# Altium PCB RiskChemi_Sensors_V2.04M2.PcbDoc
Units mil, origin at the board's own origin, x right, y up, seen from the top; angles counter-clockwise.
Board outline 6000 x 4000 mil, 2 copper layers (Top Layer, Bottom Layer); 86 components, 52 nets, 285 pads, 696 vias.
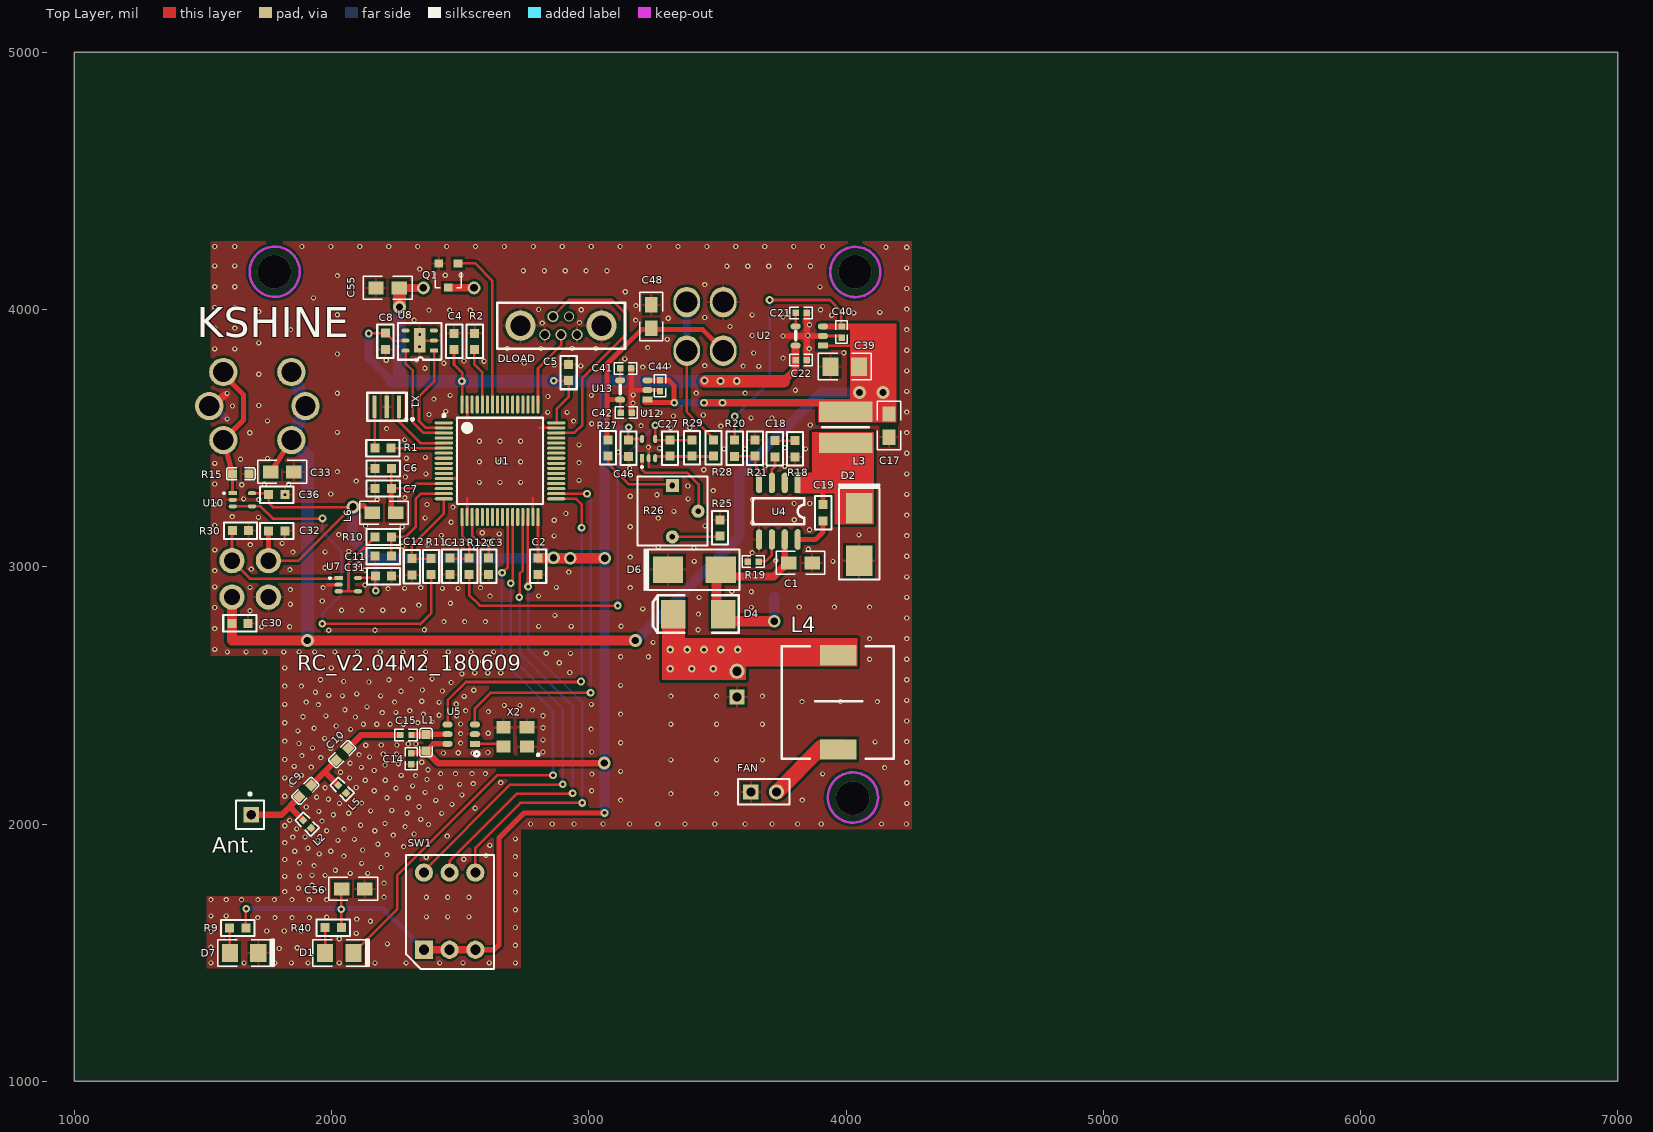
[diagram p0: Top Layer view]
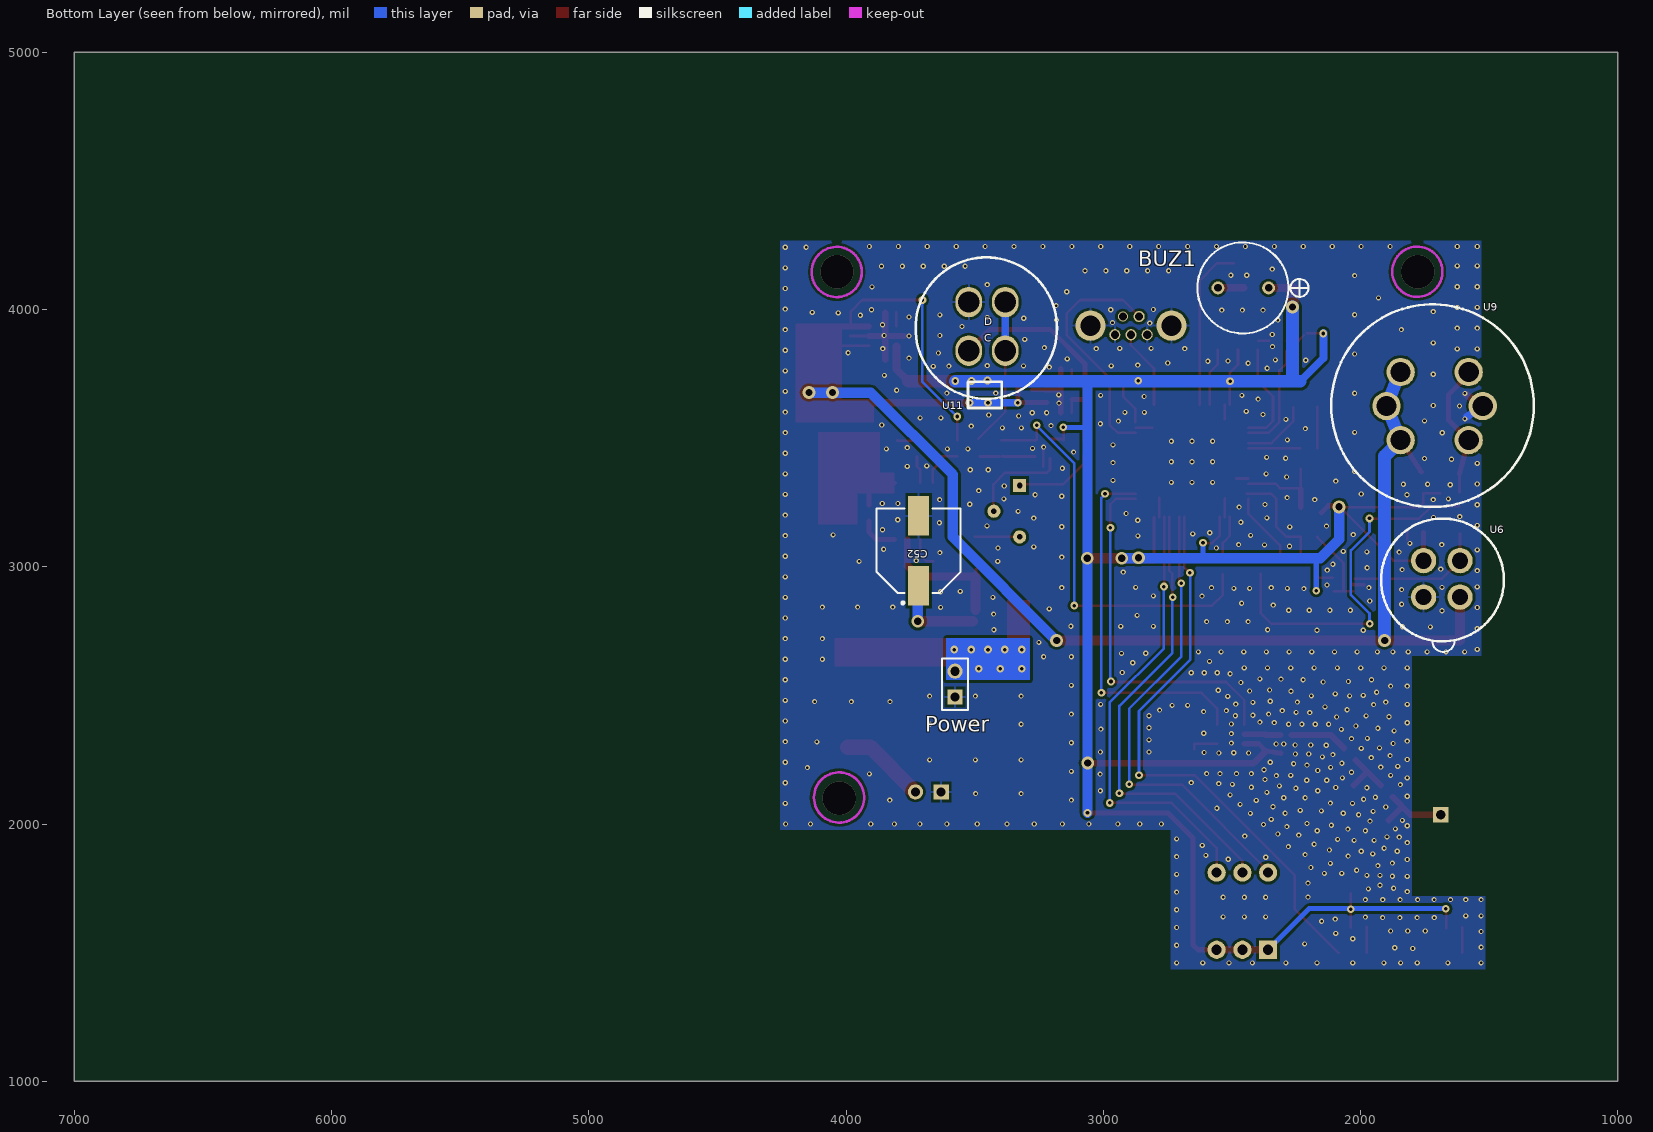
[diagram p1: Bottom Layer view, seen from below]

## Layer stack, top to bottom
Top Solder: solder mask 0.4, Solder Resist, Dk 3.5
Top Layer: signal copper 1.4
Dielectric 1: dielectric 12.6, FR-4, Dk 4.8
Bottom Layer: signal copper 1.4
Bottom Solder: solder mask 0.4, Solder Resist, Dk 3.5

## Board outline
1000,1000 7000,1000 7000,5000 1000,5000

## Design rules (kind name [scope] priority, off if disabled: settings)
Clearance [All] p1: gap=3
ComponentClearance [All] p1: gap=0 collisioncheckmode=3 verticalgap=0 showdistances=FALSE
MinimumSolderMaskSliver [All] p1 off: minsoldermaskwidth=10
PolygonConnect PolygonConnect_1 [IsVia] p1: connectstyle=Direct reliefconductorwidth=10 reliefentries=2 polygonreliefangle="90 Angle" airgapwidth=10
PolygonConnect [All] p2: connectstyle=Relief reliefconductorwidth=10 reliefentries=4 polygonreliefangle="90 Angle" airgapwidth=10
RoutingVias [All] p1: holewidth=28 width=50 viastyle="Through Hole" minholewidth=28 minwidth=50 maxholewidth=28 maxwidth=50
SilkToSilkClearance [All] p1 off: silktosilkclearance=10
SilkToSolderMaskClearance [IsPad] p1 off: minsilkscreentomaskgap=10 clearancetoexposedcopper=TRUE
SolderMaskExpansion [All] p1: expansion=4
Width [All] p1: maxlimit=100 minlimit=10 preferedwidth=10
26 further rules are at their usual default settings.

## Components (designator, comment, footprint, x,y, rotation, side; value= is the part's Value field where it differs from the comment)
Ant. "Antenna" PIN1 1683,2036 r0 top
BUZ1 "BUZZER 0905 through hole" BUZ0905 2455,4084 r180 bottom
C1 "10uF" 0805 3778,3015 r0 top
C2 "100nF" 0603 2799,3063 r0 top
C3 "100nF" 0603 2606,3063 r0 top
C4 "100nF" 0603 2481,3815 r180 top
C5 "100nF" 0603 2926,3694 r180 top
C6 "100nF" 0603 2262,3386 r270 top
C7 "1uF" 0603 2262,3309 r270 top
C8 "100nF" 0603 2205,3938 r0 top
C9 "0.8pF" 0603C 1900,2129 r315 top
C10 "2.2pF" 0603C 2043,2272 r315 top (schematic designator R3)
C11 "100nF" 0603 2140,3037 r90 top
C12 "100nF" 0603 2308,3061 r0 top
C13 "100nF" 0603 2457,3063 r0 top
C14 "100nF" 0402 2306,2360 r0 top
C15 "82pF" 0402 2183,2342 r90 top
C17 "22uF" 0805 4167,3594 r270 top
C18 "150pF" 0603 3719,3520 r0 top
C19 "100nF" 0603 3907,3271 r0 top
C21 "NULL" 0402 3719,3983 r90 top
C22 "1uF" 0402 3719,3799 r90 top
C27 "1uF" 0603 3320,3399.95 r180 top
C30 "1uF" 0603 1583,2776 r90 top
C31 "100nF" 0603 2141,2959 r90 top
C32 "100nF" 0603 1726,3135 r90 top
C33 "10uF" 0805 1763,3369 r0 top
C36 "100nF" 0603 1726,3276 r90 top
C39 "22uF" 1206 4050,3778 r180 top
C40 "100nF" 0402 3979,4019 r0 top
C41 "22nF" 0402 3037,3767 r90 top
C42 "1uF" 0402 3039,3595 r90 top
C44 "100nF" 0402 3273,3810 r0 top
C46 "100nF" 0603 3150,3522 r0 top
C48 "10uF" 0805 3243,3928 r90 top
C52 "47uF" cap_pol_8*10.2 3718,3062 r90 bottom
C55 "10uF" 0805 2263,4084 r180 top
C56 "10uF" 0805 2039,1748 r0 top
D1 "LED" 1206_LED 2028,1502 r0 top
D2 "B290-13-F" B290 4051,3228 r270 top
D4 "1N4007" 6032_pol 3428,2814 r180 top
D6 "SMAJ36CA" B290 3308,2989 r0 top
D7 "LED_POWER" 1206_LED 1658,1502 r0 top
DLOAD "USB Connector" Mini_USB 2892,3902 r90 top
FAN "Header 2" HDR1X2 3630,2125 r0 top
L1 "100nH" 0603C 2368,2318 r0 top
L2 "NULL" 0402 1827,2072 r45 top
L3 "15uH" "4*4 Inductor" 3991,3542 r180 top
L4 "22uH" 10*10Inductor 3969,2290 r0 top
L5 "27nH" 0402 1963,2208 r45 top (schematic designator C16)
L6 "10uH" 0805 2249,3210 r180 top
Power "Header 2" HDR1X2 3576,2494 r90 bottom
Q1 "2N7002" 2N7002 2456,4133 r180 top
R1 "100R" 0603 2261,3465 r270 top
R2 "10K" 0603 2561,3815 r180 top
R9 "510R" 0603 1697,1600 r270 top
R10 "1M" 0603 2262,3120 r270 top
R11 "1M" 0603 2383,3062 r0 top
R12 "1M" 0603 2531,3063 r0 top
R15 "200K" 0603C 1646,3362 r90 top
R18 "100k" 0603 3797,3520 r0 top
R19 "200K" 0402 3746,3024 r270 top
R20 "205K" 0603 3563,3522 r0 top
R21 "40.2K" 0603 3650,3400 r180 top
R25 "5.1K" 0603 3514,3090 r180 top
R26 "3362P_2K_adj_res" res_adj 3325,3316 r0 top
R27 "5.1K" 0603 3071,3523 r0 top
R28 "1K" 0603 3489,3401 r180 top
R29 "100K" 0603 3397,3523 r0 top
R30 "10K" 0603 1585,3136 r90 top
R40 "510R" 0603 2068,1601 r270 top
SW1 "HRO韩国韩荣拨码开关" SW_6P_HRO 2359,1511 r90 top
U1 "STM32F103RBT6" LQFP64_N 2655,3412 r0 top
U2 "RT9013-33GB" SOT-23-5 3863,3899 r90 top
U4 "MP2565DN" so-8 3812,3326 r270 top
U5 "CMT2119A" SOT23-6 2510,2351 r90 top
U6 "TGS2602" "Gas Sensor TGS2602 Slot" 1613,2882 r0 bottom
U7 "LMV321SQ3T2G" SC-70-5 2028,2956 r0 top
U8 "SHT20" SHT20 2398,3840 r180 top
U9 "Gas Sensor 2M010" "Gas Sensor 2M010 Slot" 1844,3757 r180 bottom
U10 "LMV321SQ3T2G" SC-70-5 1616,3286 r0 top
U11 "WS101" Gas_Sensor_WS101_Slot 3452.45,3921 r180 bottom
U12 "LMV321SQ3T2G" SC-70-5 3207,3422 r90 top
U13 "RT9193-30GB" SOT-23-5 3181,3689 r90 top
X1 "8M smd" 8Mhz_XTAL 2262,3622 r180 top
X2 "XTAL_Negative" XTAL3225 2669,2376 r0 top

## Footprints (in the part's own frame and the unit in brackets; to place one, negate y for a bottom-side part, rotate by r counter-clockwise, add the part's x,y. Pads: shape width x height; smd on the part's side, far side on the other; paste and mask are expansions set on the pad)
2N7002 [mm]
  rect 0.85x0.8 smd: 1(0.047,1.221) 2(-0.903,-1.179) 3(0.997,-1.179)
  silkscreen extent -1.23,-0.28 1.32,1.22
"4*4 Inductor" [mm]
  rect 5.3x2 smd: 1(-0.203,-1.548) 2(-0.203,1.552)
  silkscreen extent -2.46,0 2.13,0
8Mhz_XTAL [mm]
  rect 0.4x2.2 smd: 1(0,0) 2(1.2,0) 3(2.4,0)
  silkscreen extent -1.45,-1.39 3.13,1.4
10*10Inductor [mm]
  rect 3.6x2 smd: 1(0,0) 2(0,9.3)
  silkscreen extent -5.55,-0.92 5.49,10.19
0402 [mil]
  rect 25x25 smd: 1(3.98,-127.99) 2(3.98,-84.98)
  silkscreen extent -19,-150 26,-63
0603 [mil]
  rect 35x35 smd: 1(4.25,-92.76) 2(4.25,-29.76)
  silkscreen extent -27,-126 36,4
0603C [mil]
  rect 35x35 smd: 1(-0.83,30.88) 2(-0.83,-34.12)
  silkscreen extent -24,-57 23,54
0805 [mil]
  rect 60x50 smd: 1(90,0) 2(0,0)
  silkscreen extent -50,-45 140,45
1206 [mm]
  rect 1.6x1.8 smd: 1(0,0) 2(2.8,0)
  silkscreen extent -1.2,-1.3 4,1.3
1206_LED [mm]
  rect 1.6x1.8 smd: 1(-1.344,-0.081) 2(1.456,-0.081)
  silkscreen extent -2.54,-1.38 2.98,1.22
6032_pol [mm]
  rect 2.4x2.8 smd: 1(2.538,-0.041) 2(-2.422,-0.041)
  silkscreen extent -3.95,-1.89 4.53,1.81
B290 [mm]
  rect 3x2.6 smd: 1(5.2,0) 2(0,0)
  silkscreen extent -2.34,-2 7.06,2
BUZ0905 [mm] "Buzzer"
  round 1.27 hole 0.75: 1(2.485,0.002) 2(-2.515,0.002)
  silkscreen extent -4.55,-4.5 6.43,4.5
cap_pol_8*10.2 [mm]
  rect 3.9x2.05 smd: 1(-3.443,-0.001) 2(3.457,-0.001)
  silkscreen extent -5.27,-4.15 4.16,4.15
"Gas Sensor 2M010 Slot" [mm]
  round 2.8 hole 2: 1(0,0) 2(-1.391,-3.36) 3(0,-6.719) 4(6.719,-6.719) 5(8.109,-3.36) 6(6.719,0)
  silkscreen extent -6.84,-13.32 13.16,6.68
"Gas Sensor TGS2602 Slot" [mm]
  round 2.5 hole 1.6: 1(0,0) 2(0,-3.6) 3(3.6,-3.6) 4(3.6,0)
  silkscreen extent -4.33,-7.76 7.8,5.42
Gas_Sensor_WS101_Slot [mm]
  oval 2.6x3 hole 2.1: 1(-1.783,2.742) 2(-1.783,-2.058) 3(1.817,-2.058) 4(1.817,2.742)
  silkscreen extent -7.04,-7.72 6.93,7.16
HDR1X2 [mm] "Connector; Header; 2 Position"
  rect 1.5x1.5 hole 0.9: 1(0,0)
  round 1.5 hole 0.9: 2(2.54,0)
  silkscreen extent -1.27,-1.27 3.81,1.27
LQFP64_N [mm] "Thin QFP, 64-Leads, Body 10x10mm, Pitch 0.5mm, IPC Medium Density"
  oval 1.8x0.3 smd: 1(-5.55,3.75) 2(-5.55,3.25) 3(-5.55,2.75) 4(-5.55,2.25) 5(-5.55,1.75) 6(-5.55,1.25) 7(-5.55,0.75) 8(-5.55,0.25) 9(-5.55,-0.25) 10(-5.55,-0.75) 11(-5.55,-1.25) 12(-5.55,-1.75) 13(-5.55,-2.25) 14(-5.55,-2.75) 15(-5.55,-3.25) 16(-5.55,-3.75) 33(5.55,-3.75) 34(5.55,-3.25) 35(5.55,-2.75) 36(5.55,-2.25) 37(5.55,-1.75) 38(5.55,-1.25) 39(5.55,-0.75) 40(5.55,-0.25) 41(5.55,0.25) 42(5.55,0.75) 43(5.55,1.25) 44(5.55,1.75) 45(5.55,2.25) 46(5.55,2.75) 47(5.55,3.25) 48(5.55,3.75)
  oval 0.3x1.8 smd: 17(-3.75,-5.55) 18(-3.25,-5.55) 19(-2.75,-5.55) 20(-2.25,-5.55) 21(-1.75,-5.55) 22(-1.25,-5.55) 23(-0.75,-5.55) 24(-0.25,-5.55) 25(0.25,-5.55) 26(0.75,-5.55) 27(1.25,-5.55) 28(1.75,-5.55) 29(2.25,-5.55) 30(2.75,-5.55) 31(3.25,-5.55) 32(3.75,-5.55) 49(3.75,5.55) 50(3.25,5.55) 51(2.75,5.55) 52(2.25,5.55) 53(1.75,5.55) 54(1.25,5.55) 55(0.75,5.55) 56(0.25,5.55) 57(-0.25,5.55) 58(-0.75,5.55) 59(-1.25,5.55) 60(-1.75,5.55) 61(-2.25,5.55) 62(-2.75,5.55) 63(-3.25,5.55) 64(-3.75,5.55)
  silkscreen extent -5.67,-4.25 4.25,4.57, body extent -5,-5 5,5, height 1.6
Mini_USB [mm] "180 degree"
  round 1.1 hole 0.8: 1(0,-1.6) 3(0,0) 4(1.8,0.8) 5(0,1.6)
  round 1 hole 0.8: 2(1.8,-0.8)
  round 3 hole 2: 6(0.9,4) 7(0.9,-4)
  silkscreen extent -1.39,-6.32 3.15,6.3
PIN1 [mm] "Generic Antenna; 1 Lead"
  rect 1.5x1.5 hole 0.9: 1(0.127,0)
  silkscreen extent -1.4,-1.4 1.4,2.17
res_adj [mm]
  rect 1.3x1.3 hole 0.55: 1(0,0)
  round 1.3 hole 0.55: 2(2.54,-2.54) 3(0,-5.08)
  silkscreen extent -3.44,-5.95 3.45,0.9
SC-70-5 [mm]
  rect 0.8x0.4 smd: 1(0,0)
  oval 0.8x0.4 smd: 2(0,-0.65) 3(0,-1.3) 4(1.9,-1.3) 5(1.9,0)
  silkscreen extent -0.91,-0.05 -0.81,0.05
SHT20 [mm]
  rect 0.8x0.4 smd: 1(0,0)
  oval 0.8x0.4 smd: 2(0,-1) 3(0,-2) 4(2.8,-2) 5(2.8,-1) 6(2.8,0)
  rect 1.1x2.4 smd: 2(1.402,-1.019)
  silkscreen extent -0.75,-2.72 3.53,0.89
so-8 [mil]
  rect 80x24 smd: 1(0,0)
  oval 80x24 smd: 2(0,-50) 3(0,-100) 4(0,-150) 5(220,-150) 6(220,-100) 7(220,-50) 8(220,0)
  silkscreen extent 60,-175 160,25
SOT23-6 [mm]
  rect 0.6x1 smd: 1(-0.998,-1.204)
  oval 0.6x1 smd: 2(-0.048,-1.204) 3(0.902,-1.204) 4(0.902,1.496) 5(-0.048,1.496) 6(-0.998,1.496)
  silkscreen extent -2.23,-1.62 -1.76,-1.14, body extent -1.5,-1.3 1.4,1.5, height 1.2
SOT-23-5 [mm]
  rect 0.6x1 smd: 1(-0.995,-1.201)
  oval 0.6x1 smd: 2(-0.045,-1.201) 3(0.905,-1.201) 4(0.905,1.499) 5(-0.995,1.499)
  silkscreen extent -0.4,1.5 0.4,1.5, body extent -1.5,-1.3 1.4,1.5, height 1.2
SW_6P_HRO [mm]
  rect 1.8x1.8 hole 1: 1(0,0)
  round 1.8 hole 1: 2(0,-2.54) 3(0,-5.08) 4(7.62,-5.08) 5(7.62,-2.54) 6(7.62,0)
  silkscreen extent -1.89,-6.93 9.34,1.74
XTAL3225 [mm]
  rect 1.4x1.2 smd: 1(0,-1.9) 2(2.3,-1.9) 4(0,0)
  rect 1.5x1.2 smd: 3(2.3,0)
  silkscreen extent 3.32,-2.82 3.52,-2.62

## Part data
Ant.: "Generic Antenna"
BUZ1: library part BUZZER, "Buzzer"
C1 C17: library part Cap, "Capacitor,50V"
C2 C3 C4 C5 C6 C7 C8 C11 C12 C13 C14 C15 C18 C19 C21 C22 C27 C30 C31 C32 C33 C36 C39 C40 C41 C42 C44 C46 C48 C55 C56 L2 L5: library part Cap, "Capacitor"
C9 C10 L1 L6: library part Inductor, "Inductor"
C52: library part "Cap Pol1", "Polarized Capacitor (Radial)"
D1 D7: library part LED0, "Typical INFRARED GaAs LED"
D2: library part Diode, "Default Diode"
D4 D6: library part "Diode 1N4007", "1 Amp General Purpose Rectifier"
DLOAD: library part Component_1
FAN Power: "Header, 2-Pin"
L3 L4: library part Inductor, "Inductor, 1A"
Q1: library part N-MOSFET
R1 R2 R9 R10 R11 R12 R15 R18 R19 R20 R21 R25 R27 R28 R29 R30 R40: library part Res1, "Resistor"
R26: library part res_adj
SW1: library part SW_6P
U1: library part STM32F103R8T6, "STM32 ARM-based 32-bit MCU with 64 Kbytes Flash, 64-pin LQFP, Industrial Temperature"
U2 U13: library part RT9193
U4: library part MP1584, "DCDC 4.5V~28V input 1.8V ~5V output low power"
U6: "VOC sensor"
U9: library part "Gas Sensor"
U11: library part "Gas Sensor_WS101"

## Via types
v1: diameter 20, hole 10, Top Layer to Bottom Layer, tented both sides, 641 vias
v2: diameter 30, hole 14, Top Layer to Bottom Layer, 41 vias
v3: diameter 50, hole 28, Top Layer to Bottom Layer, 11 vias
v4: diameter 129.92, hole 129.92, Top Layer to Bottom Layer, 3 vias

## Nets (pads, with @x,y where several pads share a name; then routed paths per layer and width w, separated by ;. In a path a pad name is that pad's centre, name@x,y a point inside that pad or via, vN(x,y) a via of type N, cw(c..) or ccw(c..) an arc to the next point about the centre after c; other vN are vias at no path point)
24V: C1.2 C52.1 D4.2 D6.1 U4.7 | length 845.6
  Top Layer w10: D6.1@3494.72,2962 D6.1@3494.72,2990
  Top Layer w25: C1.2@3762,3002 U4.7
  Top Layer w30: D6.1@3494.72,2962 3719,2962 C1.2@3761,3004
  Top Layer w40: D4.2@3496.72,2831.72 D6.1@3496.72,2962 ; D4.2@3506,2788.63 v3@3709.63,2788.63
  Bottom Layer w40: v3(3721,2788) C52.1@3721,2884
A5V0: C17.2 C30.2 C33.2 C39.1 C40.2 C44.2 L3.1 R20.2 U2.1 U2.3 U6.1 U9.1 U9.2 U9.3 U13.1 U13.3 | length 6640.8
  Top Layer w10: R20.2 v2@3567.25,3585.25 ; v2(3703,4037) 3937,4037 3981,3993 C40.2@3981,3931 ; U2.1 4032,3859.83
  Top Layer w20: C33.2 1843.77,3492.64 U9.3@1844,3493 ; 3218,3638 v2(3332,3638) 3332,3704 3311,3725 U13.3@3228,3725
  Top Layer w24: U2.3@3910,3934 4031,3934
  Top Layer w30: v2(3448,3638) v2(3520,3638) L3.1@3919,3638
  Top Layer w40: U6.1 1613,2713 v3@3186,2713
  Bottom Layer w10: v2@3571,3587 3703,3719 v2@3703,4036
  Bottom Layer w30: v2@3331,3638 v2(3332,3638) v2(3448,3638) v2(3520,3638)
  Bottom Layer w40: v3@3178,2709 3585,3116 3585,3359 3903,3677 4143,3677 v3@4144,3676
  Bottom Layer w50: U9.3 1898.86,3624.67 1899,3625 1846.07,3757.82 U9.1@1846,3758 ; U9.3@1844.5,3491.5 1906,3430 v3(1906,2713)
  other v2: 3567,3584
  other v3: 3181,2713 4052,3677 4144,3677
ADC_IN1: R10.1 U7.3 U7.4 | length 321.4
  Top Layer w10: U7.3 U7.4 ; 2066,2906 2066,3008 ; 2066,3014 R10.1@2168.24,3116.24
ADC_IN2: R11.1 U10.3 U10.4 | length 1426.1
  Top Layer w10: U10.3 U10.4 1724.18,3234.82 1772,3187 v2@1960,3187 ; v2(1964,2778) 2344,2778 2345,2777 2388,2820 R11.1@2388,2972
  Bottom Layer w10: v2@1964,3187 v2(1965,3188) 1965,3136 2037,3064 2037,2891 1965,2819 v2@1965,2781
ADC_IN3: C27.1 R12.1 R29.2 U12.4 | length 1622.6
  Top Layer w10: R12.1 2535.25,2890.75 2577,2849 v2@3114,2849 ; U12.4 v2@3258.18,3548.82 ; U12.4@3259.76,3491.76 R29.2@3395.76,3491.76
  Bottom Layer w10: v2(3113,2849) 3113,3403 v2@3258,3548
  other v2: 3258,3550
BUZZER: Q1.2 U1.58 | length 641.9
  Top Layer w10: Q1.2@2493,4180 2557,4180 2625.47,4111.53 U1.58
CLK: U1.33 U5.4 | length 1440.2
  Top Layer w10: U5.4 2451.1,2481.1 2522,2552 v2@2971,2552 ; U1.33 2950.64,3264.36 2972,3243 v2(2972,3152)
  Bottom Layer w10: v2@2972,2556 v2@2972,3154
  other v2: 2970,2554
D3V0: C42.2 C48.2 R27.2 U11.2 U13.5 | length 933.1
  Top Layer w10: C42.2@3121.98,3598.98 U13.5
  Top Layer w20: R27.2@3071,3493 3071,3788 3206,3923 3441,3923 U11.2@3522,3842 ; 3075.17,3649.83 U13.5
D3V3: BUZ1.1 C2.2 C3.2 C4.2 C5.2 C8.2 C14.2 C22.2 C31.2 C32.2 C36.2 C46.2 C55.2 C56.2 L1.2 L6.1 R9.2 R40.2 SW1.1 SW1.2 SW1.3 U1.19 U1.32 U1.48 U1.64 U2.5 U5.6 U6.3 U7.5 U8.5 U10.5 U12.5 | length 10871.5
  Top Layer w10: R9.2 v2@1667.24,1671.76 ; U10.5 C36.2@1756,3286 ; U6.3 1871.73,3023.73 2080,3232 1772,3232 1756.76,3247.24 C36.2@1756.76,3286.25 ; v2(2038,1669) C56.2@2038,1731 ; R40.2 v2@2038.24,1668.24 ; U7.5@2107.8,2957 C31.2@2170.76,2957 ; v2@2144.76,3908.24 C8.2 ; L6.1@2152,3210 L6.1 ; v2@2170.76,2904.76 C31.2@2170.76,2966.25 ; C8.2@2220,3900 2241,3879 U8.5@2286,3879 ; C4.2@2476,3844 2476,3786 2507.36,3754.64 U1.64 ; U1.19 2546.73,3122.27 2577,3092 v2@2612,3092 ; C3.2@2611,3033 v2@2611,3091 ; C2.2@2802.64,3033 C2.2@2802.64,3033.24 ; U1.32 C2.2@2802.64,3033.24 ; C2.2 C2.2@2802.64,3033.24 ; v2@2866.76,3723.76 C5.2 2921.75,3660.75 2876,3615 U1.48@2876,3561 ; C46.2 v2@3154.25,3546.75 ; C46.2@3159.2,3496.8 U12.5
  Top Layer w20: U6.3 C32.2@1754.73,3133 ; v3@2084,3237 2125,3237 L6.1@2152,3210 ; C14.2 L1.2@2367,2284 ; L1.2@2369,2285 2395.71,2311.71 U5.6@2453,2311.71 ; SW1.3 2632,1511 2651,1530 2651,1946 2748,2043 v2@3055,2043
  Top Layer w25: L1.2 2414.05,2237 v3@3058,2237
  Top Layer w30: C55.2@2278.08,4084.08 BUZ1.1 ; SW1.1 SW1.2 SW1.3 ; 3757,3721 3803.98,3767.98 U2.5@3803.98,3857
  Top Layer w40: C2.2@2802.64,3033 v3(3062,3033)
  Top Layer w50: v3(2264,4010) C55.2@2264,4079 ; v2@3454,3721 3757,3721
  Bottom Layer w10: v2(2507,3721) 2507,3725 v2@2508,3726
  Bottom Layer w20: v2@1672,1671 2199,1671 SW1.1 ; v2(2172,2907) 2172,3027 ; 2612,3037 v2(2612,3093) ; 3082,3542 v2(3155,3542)
  Bottom Layer w30: v2@2144,3909 2144,3811 2234,3721
  Bottom Layer w40: v3(2083,3233) 2083,3107 2156.5,3033.5 2157,3034 2158,3033 v3(2928,3033) ; v2@3061,2044 3061,3714
  Bottom Layer w50: 2234,3721 2264,3721 ; v3@2264,4011 v3(2264,4010) 2264,3721 ; v2@3574,3721 v2(2507,3721) 2264,3721
  other v2: 1668,1670 3061,2043 3512,3722 3575,3722 2864,3723 3450,3724 2145,3907
  other v3: 3060,2237 2863,3035
DATA: U1.34 U5.3 | length 1436.3
  Top Layer w10: U5.3 2557.4,2449.4 2618,2510 v2@3006,2510 ; U1.34 v2(2993,3284)
  Bottom Layer w10: v2@2992,3283 3007,3268 v2@3007,2509
  other v2: 3007,2510
DGND: C1.1 C2.1 C3.1 C4.1 C5.1 C6.1 C7.1 C8.1 C11.2 C12.1 C13.1 C14.1 C17.1 C21.1 C22.1 C30.1 C31.1 C32.1 C33.1 C36.1 C39.2 C40.1 C41.1 C42.1 C44.1 C46.1 C48.1 C52.2 C55.1 C56.1 D2.1 D6.2 D7.2 DLOAD.1 DLOAD.5 DLOAD.6 DLOAD.7 FAN.1 L2.1 L5.1 Power.1 Q1.3 R2.1 R15.2 R18.1 R19.1 R21.1 R25.1 R30.1 U1.12 U1.18 U1.31 U1.47 U1.63 U2.2 U4.5 U5.2 U6.4 U7.2 U8.2 U9.5 U10.2 U11.1 U12.2 U13.2 X1.2 X2.2 X2.3 X2.4 | length 1331.4
  Top Layer w10: 1818.76,3105.24 C32.1 ; U8.2@2355.63,3879.37 U8.2@2398,3879.37 ; U1.12 2482.1,3343.1 ; U1.18 2527.05,3265.95 ; 2527.05,3572.95 U1.63 ; U1.31 2782.95,3268.95 ; 2808.95,3539.95 U1.47 ; 3232.59,3389 v1@3232.59,3457 ; U2.2 C40.1@3983.77,3897.23
  Top Layer w15: 1986,2930 U7.2 ; U13.2 C44.1@3277.23,3687.23
  Top Layer w20: C42.1@3164.99,3599.01 3164.99,3687.23 ; C41.1 3164.99,3687.23 ; U13.2 3164.99,3687.23
  Top Layer w25: 3773.77,3897.23 v1@3846.99,3897.23 ; C22.1@3846.99,3804 v1@3846.99,3897.23 ; C21.1 v1@3846.99,3897.23 ; U2.2 v1@3846.99,3897.23
  Top Layer w30: U9.5 v1@1588,3669
  Bottom Layer w30: U9.5 1587,3583
  other v1: 1531,1460 1660,1460 1779,1460 1844,1460 1909,1460 2030,1460 2169,1460 2290,1460 2420,1460 2511,1460 2613,1460 2715,1460 1797,1516 1867,1519 1531,1521 2715,1528.86 2217,1534 2030,1554 2096,1575 1531,1582 1748,1584 1816,1584 1883,1584 2715,1597.71 2151,1622 2098,1630 1713,1636 1780,1636 1847,1636 1914,1636 1981,1638 2369,1639 2451.5,1639 2534,1639 1531,1643 1590.5,1643 2715,1666.57 1531,1706 1590.5,1706 1650,1706 1714,1706 1778,1706 1845.67,1706 1913.33,1706 1981,1706 2369,1715 2451.5,1715 2534,1715 2204,1716 2715,1735.43 1818,1737 1969,1748 1871,1750 1924,1762 2204,1770 1818,1796.5 1876,1797 1924,1800 1975,1800 2715,1804.29 2073,1808 2140,1808 2015,1820 2193,1831 1932,1838 2117,1847 1876,1848 1818,1862 2514,1863 2368,1871 2715,1873.14 2048,1875 2601,1878 2215,1881 1952,1884 1857,1894 1997,1894 2121,1899 1908,1906 2280,1912 2615,1917 2180,1921 1818,1927.5 1947,1936 2025,1936 2089,1940 2715,1942 1849,1949 1897,1950 2450,1953 2240,1957 2321,1961 1981,1974 2168,1974 2049,1980 1864,1981 2286,1990 1818,1993 2113,1995 2377,1998 2774,2000 2858,2000 2943,2000 3056,2000 3159,2000 3268,2000 3374,2000 3490,2000 3608,2000 3713,2000 3812,2000 3904,2000 4138,2000 4235,2000 2208,2002 1963,2011 1837,2014 2347,2018 2007,2036 2428,2041 2067,2042 2293,2042 1951,2049 2152,2051 2234,2053 2558,2061 1902,2066 2340,2067 2468,2076 2031,2080 4236,2080.07 2117,2081 2405,2092 3124,2093 3830,2093 1988,2096 2215,2102 2298,2102 1942,2104 1818,2108 2507,2113 3319,2118 3496,2118 2364,2123 2166,2129 3011,2129 2251,2139 1975,2141 2096,2142 2424,2143 2315,2148 1845,2153 2498,2154 2551,2157 4236,2160.14 2658,2161 2131,2170 2209,2170 2371,2173 1818,2179.38 2070,2179 2327,2188 1883,2189 2271,2189 3012,2194 3909,2195 2424,2196 2482,2196 2546,2196 2598,2196 2035,2201 3124,2204.4 2166,2208 2375,2211 4150,2219 2116,2220 1921,2221 1855,2224 2208,2229 2260,2234 2072,2236 2351,2240 4236,2240.21 3319,2249 3497,2249 3675,2249 1818,2250.75 1958,2258 2148,2261 1885,2266 2107,2270 2201,2272 2253,2272 2435,2276 2550.33,2276 2492.67,2277 2608,2278 2822,2280 3011,2280 1997,2294 1926,2296 2133,2306 2193.5,2307 2254,2307 2298,2311 2328,2311 1873,2313 2502,2314.25 3124,2315.8 4113,2319 4236,2320.29 1818,2322.12 2822,2327 2035,2332 1973,2333 2502,2351.5 2609,2353 1869,2362 2074,2368 3009,2369 1932,2372 2822,2374 2018,2381 2124,2388 2175.8,2388 2227.6,2388 2279.4,2388 3319,2388 3497,2388 3675,2388 2502,2388.75 1818,2393.5 2335,2394 2391,2396 4236,2400.36 2093,2416 1889,2417 1978,2420 2486,2421 2822,2421 2418,2423 2357,2427 3124,2427.2 2197,2433 2250,2434 2610,2437 2304,2441 2521,2441 2781,2443 2052,2444 2138,2455 2672,2461 2732,2461 1949,2464 1818,2464.88 3010,2465 2485,2466 2418,2473 1902,2474 2245,2474 3829,2476 3979,2476 4122,2476 2351,2477 4236,2480.43 2516,2496 3319,2497 3497,2497 3675,2497 2042,2498 2191,2498 1989,2500 2098,2506 1937,2512 2270,2516 2431,2517 2553,2520 2353,2521 1818,2536.25 1883,2536 3124,2538.6 2465,2550 2145,2552 2047,2554 4236,2560.5 1957,2561 2223,2561 2309,2563 2391,2564 2507,2584 2557,2588 2607.5,2588 2658,2588 2926,2589 1818,2607 1908.56,2607 1999.11,2607 2089.67,2607 2180.22,2607 2270.78,2607 2361.33,2607 2451.89,2607 2885,2627 2587,2632 4092,2640.57 4236,2640.57 3124,2650 3232,2650 2929,2663 2835,2664 1595,2669 1668,2669 1741,2669 1814,2669 1874,2669 1934,2669 2012.92,2669 2101.08,2669 2189.23,2669 2277.38,2669 2365.54,2669 2453.69,2669 2541.85,2669 2630,2669 1546,2679 3250,2706 4092,2720.64 4236,2720.64 1989,2753 2169,2753 2361,2755 3425,2755 1546,2759.33 1728,2766 1837,2767 2805,2768 2932,2768 3126,2769 2437,2787 2517.5,2787 2598,2787 4236,2800.71 2868.5,2811 3426,2816 1683,2829 2039,2831 2119,2831 2199,2831 2279,2831 3210,2836 1546,2841.67 3632,2842 3818,2843 3955,2843 4092,2843 2339,2851 1840,2854 2462,2858 1964,2867 3429,2881 4236,2880.79 2616,2886 2805,2887 3632,2903 3556,2904 1840,2911 2220,2915 2284,2916 2431,2916 2492,2916 1967,2919 2347,2919 2579,2919 3161,2919 1683,2920 2874,2920 1546,2922 2130,2929 4236,2960.86 2922,2979 1546,2985.33 2129,2987 1838,2989 1688,2991 1974,2996 2107,3010 3410,3021 3949,3021 3727,3024 3161,3037.33 4236,3040.93 3635,3055 1850,3057 1975,3058 2067,3060 1546,3065.67 3854,3068 2560,3073 3409,3073 3270,3077 2276,3080 2373,3085 1684,3086 2474,3086 1808,3091 2865,3120 4236,3121 2427,3122 4050,3124 2028,3125 2652,3128 2586,3132 3858,3144 2275,3155 3161,3155.67 2132,3158 3452,3159 1546,3161 3637,3171 2465,3173 2866,3181 3799,3183 3270,3189 2364,3190 1716,3192 1614,3195 4236,3201.07 2911,3207 3331,3215 2472,3232 1546,3241.33 2371,3242 3519,3243 3798,3246 3859,3246 1717,3261 2178,3261 3636,3261 1658,3264 3386,3264 2285,3269 3161,3274 1819,3280 3265,3280 4236,3281.14 1997,3283 3484,3296 3385,3314 1651,3319 1739,3321 1833,3321 1546,3321.67 2575,3328 2655,3328 2735,3328 2096,3333 2962,3336 2287,3349 2367,3361 4236,3361.21 2023,3370 3447,3377 3517,3377 3159,3383 3762,3390 3686,3392 1546,3402 2962,3405 2575,3408 2655,3408 2735,3408 1646,3418 1751,3421 2291,3422 2365,3425 4236,3441.29 3115,3446 3526,3458 3606,3458 3843,3458 3275,3460 3762,3463 3232,3465 2962,3474 2575,3488 2655,3488 2735,3488 2284,3493 1682,3521 4236,3521.36 2023,3522.4 2214,3537 3318,3540 3392,3540 3513,3547 3203,3549 3861,3551 3011,3556 2941,3566 1751,3567 2290,3573 1594,3575 3631,3579 3712,3579 3329,3586 3445,3590 2379,3592 3220,3599 3276,3599 2840,3600 2916,3600 4236,3601.43 2444,3604 1615,3625 1717,3627 3172,3636 2398,3652 2841,3662 2461,3666 3010,3666 3173,3668 1594,3674 2023,3674.8 3418,3675 3608,3675 4236,3681.5 3803,3686 3851,3744 1717,3748.67 4236,3761.57 2363,3772 3210,3776 3661,3779 3600,3780 2969,3781 3310,3781 3451,3782 2866,3784 2437,3791 2749,3792 2593,3799 2515,3800 2213,3803 2331,3804 3140,3808 3755,3811 2023,3827.2 3641,3831 3992,3832 4236,3841.64 1546,3847 1624,3847 2683,3848 3027,3848 3857,3848 2814,3849 2936,3849 3229,3852 2342,3856 1717,3870.33 3305,3884 3755,3897 3635,3899 3852,3899 2343,3903 1841,3922 4236,3921.71 1546,3927.6 1624,3927.6 3549,3934 3858,3941 2819,3947 2964,3949 2321,3959 3182,3959 3309,3966 3451,3969 3755,3971 3944,3978 3635,3979 2023,3979.6 4030,3987 4131,3989 1717,3992 2379,3998 2459,3998 2539,3998 2971,3999 3901,3999 2805,4000 4236,4001.78 1546,4008.2 1624,4008.2 3183,4015 1930,4045 3142,4069 4236,4081.86 3899,4088 1546,4088.8 1624,4088.8 3451,4097 2023,4132 2442,4133 2504,4133 2746,4151 2827.25,4151 2908.5,4151 2989.75,4151 3071,4151 2343,4157 4236,4161.93 3537,4168 3618.25,4168 3699.5,4168 3780.75,4168 3862,4168 1546,4169.4 1624,4169.4 4155,4242 4236,4242 1546,4245 1624,4245 1885,4245 1997.44,4245 2109.89,4245 2222.33,4245 2334.78,4245 2447.22,4245 2559.67,4245 2672.11,4245 2784.56,4245 2897,4245 3009.44,4245 3121.89,4245 3234.33,4245 3346.78,4245 3459.22,4245 3571.67,4245 3684.11,4245 3796.55,4245 3909,4245
LED_STA: D1.2 U1.26 | length 2234.7
  Top Layer w10: D1.2 2255,1668.51 2255,1800 2645,2190 v2(2861,2190) ; v2@2662,2974 2684.53,2996.53 U1.26
  Bottom Layer w10: v2@2661,2974 2661,2639 2861,2439 v2(2861,2190)
  other v2: 2663,2977
NetAnt._1: Ant..1 C9.2 L2.2 | length 286.2
  Top Layer w25: Ant..1 1806,2036 C9.2@1875,2105 ; 1840,2064.63 L2.2
NetBUZ1_2: BUZ1.2 Q1.1 | length 92.9
  Top Layer w30: Q1.1 BUZ1.2@2547.07,4084.93
NetC6_2: C6.2 C7.2 L6.2 U1.13 | length 359.2
  Top Layer w10: C7.2@2232,3306 2313,3306 2330.42,3323.42 U1.13 ; C7.2@2232.24,3308.76 C6.2
  Top Layer w20: L6.2@2232.24,3230.24 C7.2
NetC9_1: C9.1 C10.2 L5.2 | length 209.2
  Top Layer w25: C9.1@1921,2151 1975,2205 C10.2@2018,2248 ; 1975,2201.63 L5.2
NetC10_1: C10.1 C15.2 | length 224.1
  Top Layer w25: C10.1 2115.91,2346.09 ; 2116,2346 C15.2@2267,2346
NetC11_1: C11.1 R10.2 U1.15 | length 418.4
  Top Layer w10: R10.2@2232,3116 2288,3116 2327,3155 2327,3264 2347,3284 U1.15@2442,3284 ; C11.1@2232.24,3040.76 R10.2
NetC12_2: C12.2 R11.2 U1.16 | length 361.4
  Top Layer w10: C12.2 R11.2@2387.24,3031.24 ; C12.2@2318,3032 2312,3038 2312,3083 2436.5,3207.5 U1.16
NetC13_2: C13.2 R12.2 U1.17 | length 252.4
  Top Layer w10: C13.2@2457,3032 2458,3031 2535,3031 2535,3093 2507.36,3120.64 U1.17
NetC15_1: C15.1 L1.1 U5.5 | length 142.8
  Top Layer w20: L1.1 U5.5@2452,2348.88
  Top Layer w25: C15.1 L1.1@2368.98,2345.98
NetC18_1: C18.1 U4.3 | length 107
  Top Layer w10: U4.3 3712,3378 3724,3390 C18.1@3724,3428
NetC18_2: C18.2 R18.2 | length 78.1
  Top Layer w10: C18.2 3800.24,3490.24 R18.2@3801,3491
NetC19_1: C19.1 U4.8 | length 154.4
  Top Layer w20: U4.8 3882,3106 3911.25,3135.25 C19.1
NetC19_2: C19.2 D2.2 L3.2 U4.1 | length 164
  Top Layer w20: U4.1 3877,3326 3911.25,3291.75 C19.2
NetC21_2: C21.2 U2.4 | length 54.4
  Top Layer w10: U2.4 C21.2@3803.98,3989.02
NetC27_2: C27.2 R28.2 R29.1 U12.3 | length 210
  Top Layer w10: U12.3@3263.76,3428.76 3315.75,3428.76 3391,3428.76 R29.1@3391,3432 ; R29.1@3401.25,3428.76 R28.2@3480.76,3428.76
NetC41_2: C41.2 U13.4 | length 42.4
  Top Layer w10: U13.4 C41.2@3121.98,3766.98
NetD1_1: D1.1 R40.1 | length 102.2
  Top Layer w10: D1.1 R40.1@1975.08,1601
NetD4_1: D4.1 L4.2 Power.2
  other v2: 3317,2603 3400.49,2604 3483.98,2604 3317,2678 3382.5,2678 3448,2678 3513.5,2678 3579,2678
NetD7_1: D7.1 R9.1 | length 99.2
  Top Layer w10: D7.1 R9.1@1605.08,1598
NetFAN_2: FAN.2 L4.1 | length 334.1
  Top Layer w60: FAN.2@3731,2125 3905,2299 L4.1@3993,2299
NetR1_1: R1.1 X1.3 | length 161.4
  Top Layer w10: X1.3@2168,3622 2168,3460.99 R1.1
NetR1_2: R1.2 U1.6 | length 202.5
  Top Layer w10: R1.2@2234,3461.21 U1.6
NetR2_2: R2.2 U1.60 | length 225.4
  Top Layer w10: R2.2@2555,3843 2555,3787 2586.1,3755.9 U1.60
NetR15_1: R15.1 U9.4 U9.6 U10.1 | length 541.3
  Top Layer w10: U10.1@1615.12,3288.88 R15.1
  Top Layer w20: U9.4@1579,3494 1579.42,3492.47 R15.1 ; U9.4 1658,3571 1658,3669 1580,3747 U9.6@1580,3759
NetR19_2: R19.2 U4.6 | length 122.4
  Top Layer w10: R19.2@3660,3021 3687,3021 3712,3046 U4.6
NetR20_1: R20.1 R21.2 U4.4 | length 185.8
  Top Layer w10: R20.1@3566.76,3429.76 R21.2 ; R21.2@3648,3427 3648,3392 3662,3378 U4.4
NetR25_2: R25.2 R26.3 | length 172
  Top Layer w10: R26.3@3328,3116 R25.2@3500,3116
NetR26_1: R26.1 R27.1 | length 312
  Top Layer w10: R27.1@3075,3431 3075,3402 3157,3320 R26.1@3324,3320
NetR26_2: R26.2 U12.1 | length 393.6
  Top Layer w10: U12.1 3207,3377 3218,3366 3381,3366 3427,3320 R26.2@3427,3215
NetR28_1: R28.1 U11.3 U11.4 | length 571.6
  Top Layer w10: U11.3 3380.9,3602.1 R28.1@3486,3497
  Bottom Layer w30: U11.3@3380.9,3843.9 U11.4
NetU1_5: U1.5 X1.1 | length 264.9
  Top Layer w10: X1.1@2262,3620 2262,3564 2345.1,3480.9 U1.5
NetU5_1: U5.1 X2.1 | length 110.3
  Top Layer w10: U5.1 2647,2311.71 X2.1@2647,2291
SHT_SCL: U1.3 U8.6 | length 425.4
  Top Layer w10: U8.6@2288,3838 2288,3791 2315,3764 2315,3563 2357.73,3520.27 U1.3
SHT_SDA: U1.2 U8.1 | length 408.1
  Top Layer w10: U8.1@2399,3843 2399,3721 2340,3662 2340,3567 2367.05,3539.95 U1.2
SW1: SW1.6 U1.27 | length 1819.2
  Top Layer w10: SW1.6 2359,1818 2694,2153 v2@2901,2153 ; v2@2687,2938 2694,2938 2704.21,2948.21 U1.27
  Bottom Layer w10: v2@2697,2935 2697,2650 2899,2448 v2(2899,2154)
  other v2: 2697,2936
SW2: SW1.5 U1.29 | length 1796.6
  Top Layer w10: SW1.5 2459,1856 2721,2118 v2@2941,2118 ; v2@2731,2886 2731,2973 2743.58,2985.58 U1.29
  Bottom Layer w10: v2@2731,2882 2731,2665 2937,2459 v2(2937,2119)
  other v2: 2730,2882
SW3: SW1.4 U1.30 | length 1782.4
  Top Layer w10: SW1.4 2559,1907 2734,2082 v2@2974,2082 ; v2@2763.27,2923 U1.30
  Bottom Layer w10: v2(2764,2923) 2764,2683 2975,2472 v2(2975,2082)
SWCLK: DLOAD.3 U1.49 | length 309.9
  Top Layer w10: U1.49 2802.64,3771.64 2893,3862 DLOAD.3@2893,3903
SWDIO: DLOAD.4 U1.46 | length 946.9
  Top Layer w10: DLOAD.4@2860,3973 2924,4037 3090,4037 3142,3985 3142,3901 2975,3734 2975,3552 2943.27,3520.27 U1.46
VTEST: R30.2 U6.2 U7.1 | length 543.2
  Top Layer w10: R30.2@1613,3129 U6.2 1682.73,2954 U7.1@2022,2954
pads on no net: DLOAD.2 U1.1 U1.4 U1.7 U1.8 U1.9 U1.10 U1.11 U1.14 U1.20 U1.21 U1.22 U1.23 U1.24 U1.25 U1.28 U1.35 U1.36 U1.37 U1.38 U1.39 U1.40 U1.41 U1.42 U1.43 U1.44 U1.45 U1.50 U1.51 U1.52 U1.53 U1.54 U1.55 U1.56 U1.57 U1.59 U1.61 U1.62 U4.2 U8.3 U8.4
copper on no net:
  other v4: 4027,2100 1777,4147 4035,4147

## Polygon pours and split planes (outlines as drawn)
DGND on Top Layer "Top Side-DGND" (solid, remove dead copper, pour order 8): 1405,4265 1405,1440 2735,1440 2735,1980 4255,1980 4255,4265
DGND on Bottom Layer "GND_L02_P-001" (solid, remove dead copper, pour order 12): 1403,4267 4256,4267 4256,1978 2738,1978 2738,1436 1403,1436 1403,4267

## Keep-outs
Keep-Out Layer:
  circle w10: c1779,4147 r97.62
  circle w10: c4036,4146 r97.62
  circle w10: c4027,2103 r97.62

## Other copper
Top Layer:
  rectangle net A5V0: 4015,3638 4196,3946
  rectangle net NetC19_2: 3955,3165 4108,3291
  rectangle net A5V0: 3891,3560 4196,3653
  region net NetD4_1: 3611,2559 3611,2723 3285,2723 3285,2559
  rectangle net NetC19_2: 3868,3285 4108,3524
  rectangle net NetC19_2: 3812,3285 3898,3367
  rectangle net NetD4_1: 3285,2705 3375,2870
  rectangle net NetD4_1: 3609,2613 4044,2723
  pour cut-out: 2612,2521 2612,2538 2945,2538 2945,2521
  pour cut-out: 2017,2286 2027,2296 2066,2257 2056,2247
  pour cut-out: 1875,2144 1884,2153 1923,2114 1914,2105
  pour cut-out: 1800,1720 1515,1720 1515,1425 1390,1425 1390,4280 1530,4280 1530,2655 1800,2655
Bottom Layer:
  rectangle net NetD4_1: 3285,2559 3611,2723
  pour cut-out: 1390,4280 1530,4280 1530,2655 1800,2655 1800,1720 1515,1720 1515,1425 1390,1425

## Silkscreen, mask and mechanical layers (free items; w line width, h text height)
Top Overlay:
  text "KSHINE" at 1476,3854 h200
  text "RC_V2.04M2_180609" at 1866,2596 h60
Mechanical 1:
  lines w10: 2743,1973 2743,1431 1398,1431 1398,2115 1398,4272 4261,4272 4261,1973 2744,1973

## Dimensions
1397,4330 to 4260,4358 on Top Overlay
1352,4272 to 1297,1432 on Top Overlay

## Text inside footprints (layer, text, board x,y; h text height)
U11: Bottom Overlay "D" at 3462.52,3939.12 h30; Bottom Overlay "C" at 3463.02,3875.57 h30